# EAGLE board 2D_PCB (EAGLE 9.7.0)
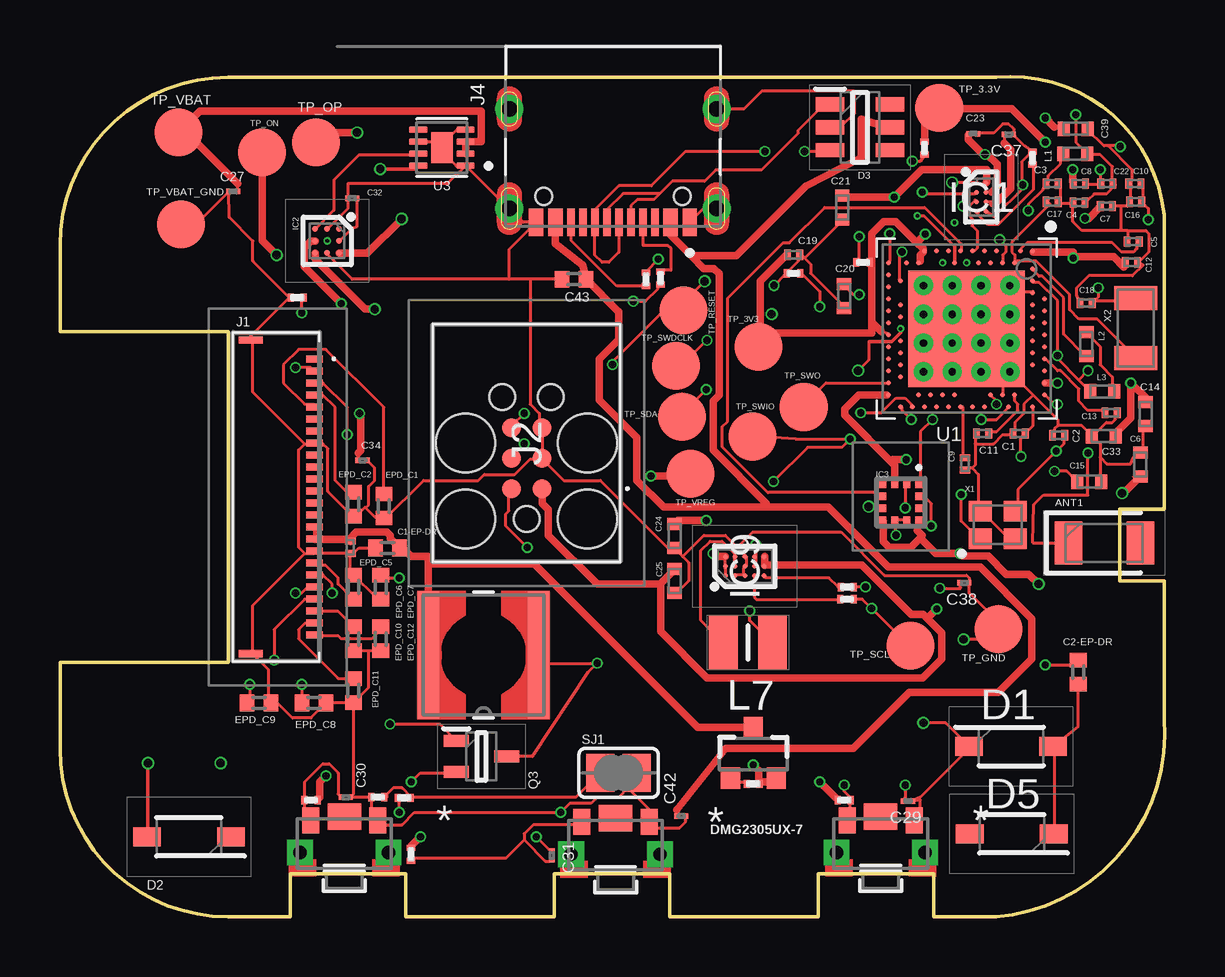
[diagram p0: board, top side]
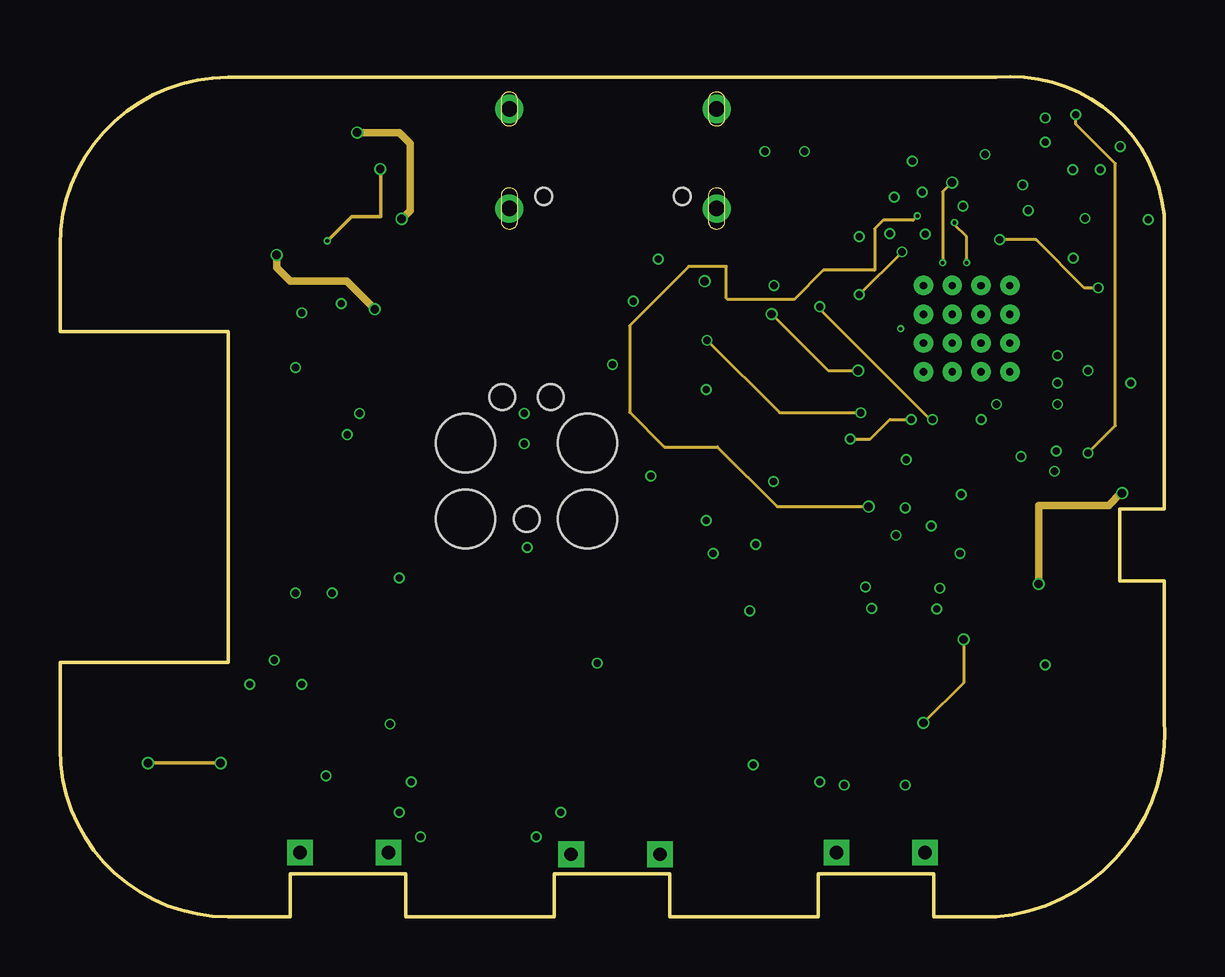
[diagram p1: board, inner layer Route2]
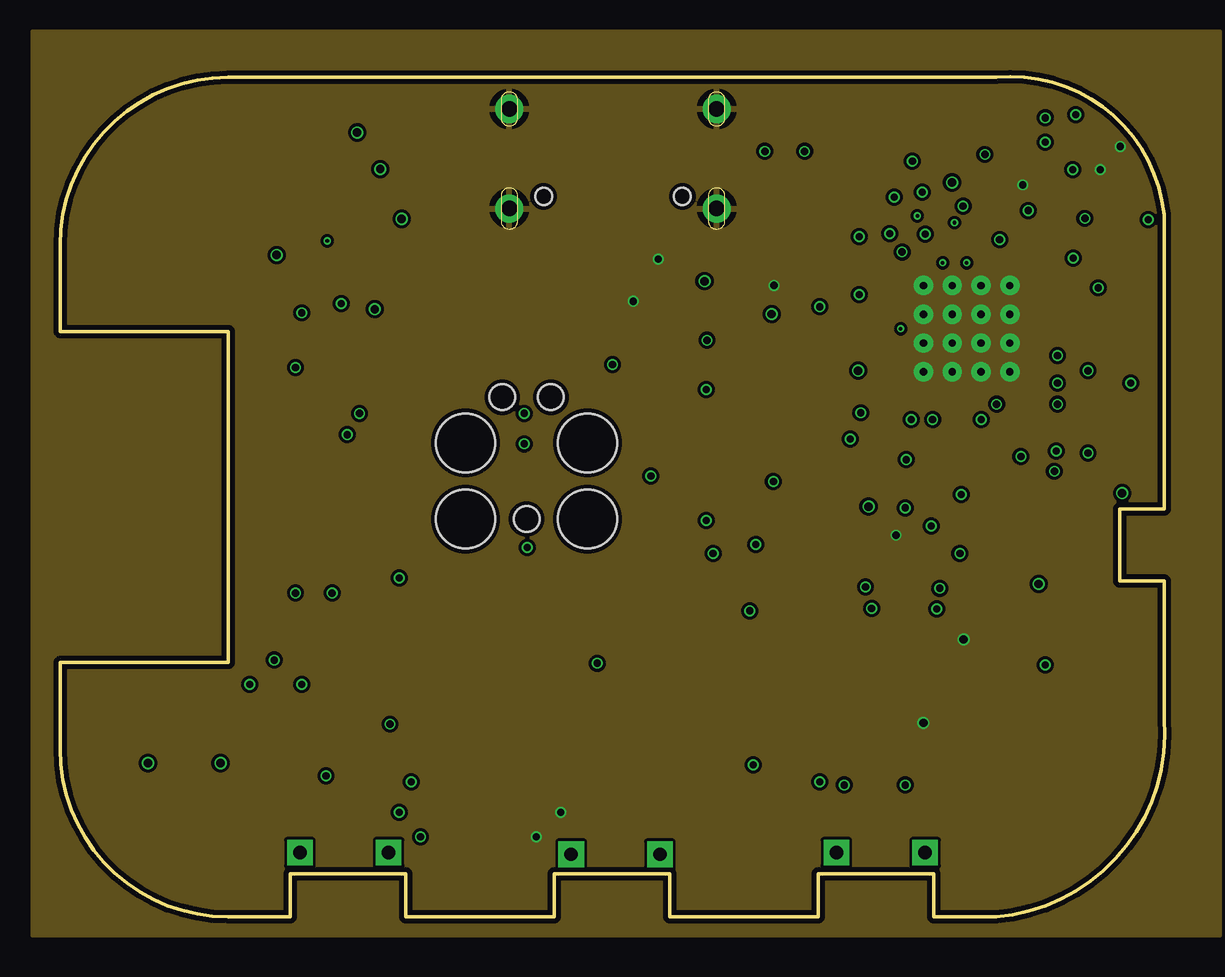
[diagram p2: board, inner layer Route15]
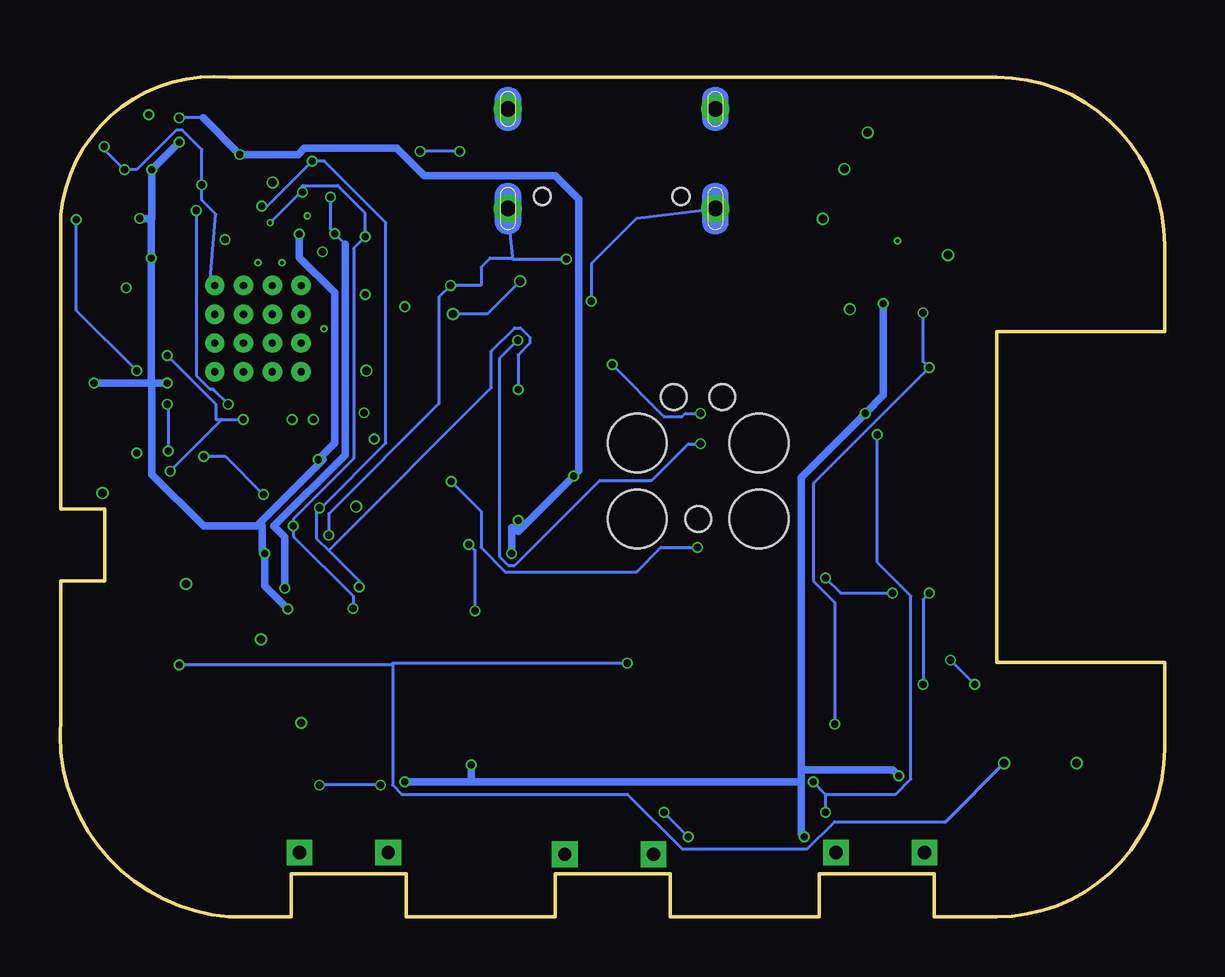
[diagram p3: board, bottom side, seen from below]

Size 46.03 x 35.03 mm. Coordinates in mm from the lower left corner, seen from the top.
Outline: 39,0 36.4,0 36.4,1.8 31.6,1.8 31.6,0 25.4,0 25.4,1.8 20.6,1.8 20.6,0 14.4,0 14.4,1.8 9.6,1.8 9.6,0 7,0 arc-90 0,7 0,10.6 7,10.6 7,24.4 0,24.4 0,28 arc-90 7,35 39,35 arc-90 46,29.27 46,17 44.16,17 44.16,14 46,14 46,8.27 arc-90 39,0
Copper layers (1+2*15+16): Top 0.035mm / dielectric 1.6mm / Route2 0.035mm / dielectric 0.15mm / Route15 0.035mm / dielectric 0.2mm / Bottom 0.035mm
Design rules "jlcpcb-2layers.dru *": minimum track width 5mil, minimum drill 0.3mm, track to track 5mil, track to pad 5mil, pad to pad 5mil, via to via 5mil, smd to smd 5mil, copper to edge 0.2mm, drill to drill 6mil, minimum pad ring 10mil, minimum via ring 3mil, stop-mask expansion 4mil, vias tented up to drill 0mil, thermal gap 10mil

## Footprints (pad centres in the part's own frame; a part is rotated, then mirrored left to right if it is on the bottom)
2450AT18B100E_ANTC3216X140N = smd 1.15 x 1.8: 1 -1.5,0; 2 1.5,0
NORDIC_NRF_3_RESC0201_L = smd 0.28 x 0.43: 1 -0.255,0; 2 0.255,0
PERFECT_0402_0402 = smd 0.6 x 0.7: 1 -0.5,0; 2 0.5,0
NORDIC_NRF_3_RESC0402_L = smd 0.5 x 0.6: 1 -0.5,0; 2 0.5,0
GRM011R60J152KE01L_2_CAPC0201X13N = smd 0.22 x 0.23: 1 -0.185,0; 2 0.185,0
ESP32_C6_LIBRARY_5_SOD3716X135N = smd 1.15 x 0.8: 1 -1.75,0; 2 1.75,0
ESP32_C6_LIBRARY_3_SOT95P280X145-6N = smd 1.2 x 0.6: 1 -1.25,0.95; 2 -1.25,0; 3 -1.25,-0.95; 4 1.25,-0.95; 5 1.25,0; 6 1.25,0.95
ESP32_C6_LIBRARY_4_ESP32_C6_LIBRARY_4_ESP32_C6_LIBRARY_4_ESP32_C6_LIBRARY_4_ESP32_WROVER_SPARKFUN-DISCRETESEMI_SOT23-3 = smd 0.8 x 0.9: 1 -0.95,-1; 2 0.95,-1; 3 0,1.1
BQ25180YBGR_BGA8C40P2X4_100X155X50 = smd 0.2 x 0.2: A1 -0.2,0.6; A2 0.2,0.6; B1 -0.2,0.2; B2 0.2,0.2; C1 -0.2,-0.2; C2 0.2,-0.2; D1 -0.2,-0.6; D2 0.2,-0.6
DRV2605YZFR_BGA9C50P3X3_144X144X62 = smd 0.25 x 0.25: A1 -0.5,0.5; A2 0,0.5; A3 0.5,0.5; B1 -0.5,0; B2 0,0; B3 0.5,0; C1 -0.5,-0.5; C2 0,-0.5; C3 0.5,-0.5
BMA423_BMA423 = smd 0.3 x 0.35: 1 -0.75,-0.775; 2 -0.25,-0.775; 3 0.25,-0.775; 4 0.75,-0.775; 7 0.75,0.775; 8 0.25,0.775; 9 -0.25,0.775; 10 -0.75,0.775 | smd 0.35 x 0.3: 5 0.775,-0.25; 6 0.775,0.25; 11 -0.775,0.25; 12 -0.775,-0.25
RT6160AWSC_BGA15C40P3X5_140X230X60 = smd 0.216 x 0.216: A1 -0.4,0.8; A2 0,0.8; A3 0.4,0.8; B1 -0.4,0.4; B2 0,0.4; B3 0.4,0.4; C1 -0.4,0; C2 0,0; C3 0.4,0; D1 -0.4,-0.4; D2 0,-0.4; D3 0.4,-0.4; E1 -0.4,-0.8; E2 0,-0.8; E3 0.4,-0.8
503480-2400_5034802400 = smd 0.3 x 0.7: 1 -5.75,1.525; 2 -5.25,1.525; 3 -4.75,1.525; 4 -4.25,1.525; 5 -3.75,1.525; 6 -3.25,1.525; 7 -2.75,1.525; 8 -2.25,1.525; 9 -1.75,1.525; 10 -1.25,1.525; 11 -0.75,1.525; 12 -0.25,1.525; 13 0.25,1.525; 14 0.75,1.525; 15 1.25,1.525; 16 1.75,1.525; 17 2.25,1.525; 18 2.75,1.525; 19 3.25,1.525; 20 3.75,1.525; 21 4.25,1.525; 22 4.75,1.525; 23 5.25,1.525; 24 5.75,1.525 | smd 0.3 x 1: MP1 -6.54,-1.125; MP2 6.54,-1.125
TC2030-IDC_TC2030IDC = smd 0.783 x 0.783: 1 -0.953,-0.635; 2 -0.953,0.635; 3 0.317,-0.635; 4 0.317,0.635; 5 1.588,-0.635; 6 1.588,0.635 | hole 2.451: -2.223,-2.54; -2.223,2.54; 0.952,-2.54; 0.952,2.54 | hole 1.067: -2.223,0; 2.857,-1.016; 2.857,1.016
KH-TYPE-C-16P_KINGHELM_KH-TYPE-C-16P = smd 0.6 x 1.15: A1_B12 -3.2,4.725; A4_B9 -2.4,4.725; A9_B4 2.4,4.725; A12_B1 3.2,4.725 | smd 0.3 x 1.15: A5 -1.25,4.725; A6 -0.25,4.725; A7 0.25,4.725; A8 1.25,4.725; B5 1.75,4.725; B6 0.75,4.725; B7 -0.75,4.725; B8 -1.75,4.725 | drill 0.65 pad 1.05: SH1 -4.32,0; SH2 4.32,0; SH3 -4.32,4.15; SH4 4.32,4.15 | hole 0.7: -2.89,3.65; 2.89,3.65
NORDIC_NRF_2_RESC0402_L = smd 0.5 x 0.6: 1 -0.5,0; 2 0.5,0
ESP32_C6_LIBRARY_2_IND_4828-WE-TPC_WRE = smd 0.9 x 5.3: 1 -2.286,0; 2 2.286,0
MLP2016SR47MT0S1_INDC2016X100N = smd 1.2 x 2.2: 1 -1.028,0; 2 1.028,0
ESP32_C6_LIBRARY_6_SOT65P210X110-3N = smd 1.05 x 0.5: 1 -1.05,0.65; 2 -1.05,-0.65; 3 1.05,0
CPF0201D7K68C1_0201 = smd 0.35 x 0.25: 1 0,0.275; 2 0,-0.275
ERA-1AEB3401C_0201 = smd 0.35 x 0.25: 1 0,0.275; 2 0,-0.275
ESP32_C6_LIBRARY_7_JUMPER_SJ = smd 1.168 x 1.6: 1 -0.762,0; 2 0.762,0
2025-10-22_07-23-44_LIBRARY_SW_EVP-AKE31A_PAN = smd 0.711 x 1.092: 1 -1.4,-0.972; 2 1.4,-0.972 | drill 0.559 pad 0.914 square: 3 -1.848,0.381; 4 1.848,0.381 | smd 1.397 x 1.092: 5 0,-1.124
HECTOR_WATCH_1_TP20R = smd 2 x 2: TP 0,0
NORDIC_NRF_4_AQFN50P700X700X85_HS-74N = smd 4.85 x 4.85: P$74 0,0 | drill 0.3 pad 0.6: P$75 -1.8,1.8; P$76 -0.6,1.8; P$77 0.6,1.8; P$78 1.8,1.8; P$79 -1.8,0.6; P$80 -0.6,0.6; P$81 0.6,0.6; P$82 1.8,0.6; P$83 -1.8,-0.6; P$84 -0.6,-0.6; P$85 0.6,-0.6; P$86 1.8,-0.6; P$87 -1.8,-1.8; P$88 -0.6,-1.8; P$89 0.6,-1.8; P$90 1.8,-1.8 | smd 0.2 x 0.2: P$A8 -1.25,3.25; P$A10 -0.75,3.25; P$A12 -0.25,3.25; P$A14 0.25,3.25; P$A16 0.75,3.25; P$A18 1.25,3.25; P$A20 1.75,3.25; P$A22 2.25,3.25; P$A23 2.75,3.25; P$AA24 3.25,-2.25; P$AB2 -2.75,-2.5; P$AC5 -2,-2.75; P$AC9 -1,-2.75; P$AC11 -0.5,-2.75; P$AC13 0,-2.75; P$AC15 0.5,-2.75; P$AC17 1,-2.75; P$AC19 1.5,-2.75; P$AC21 2,-2.75; P$AC24 3.25,-2.75; P$AD2 -2.75,-3.25; P$AD4 -2.25,-3.25; P$AD6 -1.75,-3.25; P$AD8 -1.25,-3.25; P$AD10 -0.75,-3.25; P$AD12 -0.25,-3.25; P$AD14 0.25,-3.25; P$AD16 0.75,-3.25; P$AD18 1.25,-3.25; P$AD20 1.75,-3.25; P$AD22 2.25,-3.25; P$AD23 2.75,-3.25; P$B1 -3.25,2.75; P$B3 -2.5,2.75; P$B5 -2,2.75; P$B7 -1.5,2.75; P$B9 -1,2.75; P$B11 -0.5,2.75; P$B13 0,2.75; P$B15 0.5,2.75; P$B17 1,2.75; P$B19 1.5,2.75; P$B24 3.25,2.75; P$C1 -3.25,2.25; P$D2 -2.75,2; P$D23 2.75,2; P$E24 3.25,1.75; P$F2 -2.75,1.5; P$F23 2.75,1.5; P$G1 -3.25,1.25; P$H2 -2.75,1; P$H23 2.75,1; P$J1 -3.25,0.75; P$J24 3.25,0.75; P$K2 -2.75,0.5; P$L1 -3.25,0.25; P$L24 3.25,0.25; P$M2 -2.75,0; P$N1 -3.25,-0.25; P$N24 3.25,-0.25; P$P2 -2.75,-0.5; P$P23 2.75,-0.5; P$R1 -3.25,-0.75; P$R24 3.25,-0.75; P$T2 -2.75,-1; P$T23 2.75,-1; P$U1 -3.25,-1.25; P$U24 3.25,-1.25; P$V23 2.75,-1.5; P$W1 -3.25,-1.75; P$W24 3.25,-1.75; P$Y2 -2.75,-2; P$Y23 2.75,-2
ESP32_C6_LIBRARY_SON50P200X200X80-9N = smd 0.76 x 0.27: 1 -0.985,0.75; 2 -0.985,0.25; 3 -0.985,-0.25; 4 -0.985,-0.75; 5 0.985,-0.75; 6 0.985,-0.25; 7 0.985,0.25; 8 0.985,0.75 | smd 0.9 x 1.3: 9 0,0
NORDIC_NRF_BT-XTAL_2016_N = smd 0.95 x 0.85: 1 -0.725,-0.575; 2 0.725,-0.575; 3 0.725,0.575; 4 -0.725,0.575
NORDIC_NRF_1_XTAL_3215_N = smd 1 x 1.8: 1 -1.25,0; 2 1.25,0

## Placement (x,y rotation side)
ANT1  2450AT18B100E  [2450AT18B100E_ANTC3216X140N]  43.51,15.59 0 top
C1  12pF  [NORDIC_NRF_3_RESC0201_L]  39.96,20.15 180 top
C1-EP-DR  10uF  [PERFECT_0402_0402]  13.65,15.38 180 top
C2  12pF  [NORDIC_NRF_3_RESC0201_L]  41.61,20.08 180 top
C2-EP-DR  4.7uF/25V  [PERFECT_0402_0402]  42.43,10.2 90 top
C3  1pF  [NORDIC_NRF_3_RESC0201_L]  41.33,30.57 0 top
C4  1pF  [NORDIC_NRF_3_RESC0201_L]  42.46,29.78 180 top
C5  100nF  [NORDIC_NRF_3_RESC0201_L]  44.71,28.15 180 top
C6  4.7μF  [NORDIC_NRF_3_RESC0402_L]  45.02,18.86 90 top
C7  100nF  [NORDIC_NRF_3_RESC0201_L]  43.59,29.63 0 top
C8  100nF  [NORDIC_NRF_3_RESC0201_L]  42.48,30.57 0 top
C9  820pF  [NORDIC_NRF_3_RESC0201_L]  37.71,18.88 270 top
C10  N.C.  [NORDIC_NRF_3_RESC0201_L]  44.79,30.57 180 top
C11  100pF  [NORDIC_NRF_3_RESC0201_L]  38.44,20.15 180 top
C12  100nF  [NORDIC_NRF_3_RESC0201_L]  44.64,27.29 0 top
C13  N.C.  [NORDIC_NRF_3_RESC0201_L]  43.8,21.02 0 top
C14  4.7μF  [NORDIC_NRF_3_RESC0402_L]  45.23,20.97 270 top
C15  1.0μF  [NORDIC_NRF_3_RESC0402_L]  42.88,18.15 0 top
C16  47nF  [NORDIC_NRF_3_RESC0201_L]  44.81,29.8 180 top
C17  12pF  [NORDIC_NRF_3_RESC0201_L]  41.33,29.8 180 top
C18  12pF  [NORDIC_NRF_3_RESC0201_L]  42.76,25.59 0 top
C19  100nF  [NORDIC_NRF_3_RESC0201_L]  30.56,27.59 0 top
C20  4.7μF  [NORDIC_NRF_3_RESC0402_L]  32.67,25.87 270 top
C21  4.7μF  [NORDIC_NRF_3_RESC0402_L]  32.59,29.56 270 top
C22  N.C.  [NORDIC_NRF_3_RESC0201_L]  43.62,30.57 180 top
C23  0.1uF  [GRM011R60J152KE01L_2_CAPC0201X13N]  38.06,32.65 0 top
C24  10uF  [NORDIC_NRF_3_RESC0402_L]  25.61,15.88 90 top
C25  22uF  [NORDIC_NRF_3_RESC0402_L]  25.61,14 270 top
C27  0.1uF  [GRM011R60J152KE01L_2_CAPC0201X13N]  7.22,30.24 0 top
C29  1uF  [GRM011R60J152KE01L_2_CAPC0201X13N]  35.33,4.84 180 top
C30  1uF  [GRM011R60J152KE01L_2_CAPC0201X13N]  11.91,4.99 180 top
C31  1uF  [GRM011R60J152KE01L_2_CAPC0201X13N]  20.49,2.57 270 top
C32  1uF  [GRM011R60J152KE01L_2_CAPC0201X13N]  12.18,29.96 0 top
C33  22uF  [NORDIC_NRF_3_RESC0402_L]  43.5,20.04 180 top
C34  0.1uF  [GRM011R60J152KE01L_2_CAPC0201X13N]  12.61,19.03 180 top
C37  1uF  [GRM011R60J152KE01L_2_CAPC0201X13N]  39.53,32.62 180 top
C38  10uF  [GRM011R60J152KE01L_2_CAPC0201X13N]  37.68,13.93 180 top
C39  1uF  [NORDIC_NRF_3_RESC0402_L]  42.33,32.85 0 top
C42  0.1uF  [GRM011R60J152KE01L_2_CAPC0201X13N]  25.89,4.2 0 top
C43  4.7uF  [PERFECT_0402_0402]  21.42,26.58 180 top
D1  MBR0530  [ESP32_C6_LIBRARY_5_SOD3716X135N]  39.63,7.1 0 top
D2  MBR0530  [ESP32_C6_LIBRARY_5_SOD3716X135N]  5.37,3.34 180 top
D3  USBLC6-2SC6Y  [ESP32_C6_LIBRARY_3_SOT95P280X145-6N]  33.33,32.91 0 top
D5  MBR0530  [ESP32_C6_LIBRARY_5_SOD3716X135N]  39.66,3.46 180 top
DMG2305UX-7  20V/4.2A/52mΩ/1.4W  [ESP32_C6_LIBRARY_4_ESP32_C6_LIBRARY_4_ESP32_C6_LIBRARY_4_ESP32_C6_LIBRARY_4_ESP32_WROVER_SPARKFUN-DISCRETESEMI_SOT23-3]  28.89,6.79 0 top
EPD_C1  1uF/50V  [PERFECT_0402_0402]  13.5,17.13 270 top
EPD_C2  1uF/50V  [PERFECT_0402_0402]  12.23,17.21 270 top
EPD_C5  0.1uF/50V  [NORDIC_NRF_3_RESC0201_L]  12.1,15.4 90 top
EPD_C6  1uF/50V  [PERFECT_0402_0402]  12.23,13.75 90 top
EPD_C7  1uF/50V  [PERFECT_0402_0402]  13.37,13.75 270 top
EPD_C8  1uF/50V  [PERFECT_0402_0402]  10.57,8.92 0 top
EPD_C9  1uF/50V  [PERFECT_0402_0402]  8.29,8.92 0 top
EPD_C10  1uF/50V  [PERFECT_0402_0402]  12.23,11.59 270 top
EPD_C11  1uF/50V  [PERFECT_0402_0402]  12.23,9.43 270 top
EPD_C12  1uF/50V  [PERFECT_0402_0402]  13.37,11.59 270 top
IC1  BQ25180YBGR  [BQ25180YBGR_BGA8C40P2X4_100X155X50]  38.39,30.01 0 top
IC2  DRV2605YZFR  [DRV2605YZFR_BGA9C50P3X3_144X144X62]  11.13,28.18 270 top
IC3  BMA421  [BMA423_BMA423]  35.04,17.28 180 top
IC9  RT6160AWSC  [RT6160AWSC_BGA15C40P3X5_140X230X60]  28.53,14.61 90 top
J1  503480-2400_503480-2400  [503480-2400_5034802400]  9.08,17.51 270 top
J2  TC2030-IDC  [TC2030-IDC_TC2030IDC]  19.44,18.81 90 top
J4  KH-TYPE-C-16P  [KH-TYPE-C-16P_KINGHELM_KH-TYPE-C-16P]  23.04,33.68 180 top
L1  3.9nH  [NORDIC_NRF_2_RESC0402_L]  42.3,31.81 0 top
L2  10μH  [NORDIC_NRF_2_RESC0402_L]  42.77,23.88 90 top
L3  15nH  [NORDIC_NRF_2_RESC0402_L]  43.42,21.9 180 top
L5  68uH  [ESP32_C6_LIBRARY_2_IND_4828-WE-TPC_WRE]  17.65,10.91 180 top
L7  FTC252012SR47MBCA  [MLP2016SR47MT0S1_INDC2016X100N]  28.66,11.44 0 top
Q3  SI1308EDL-T1-GE3  [ESP32_C6_LIBRARY_6_SOT65P210X110-3N]  17.56,6.69 0 top
R1_EP_DR  0.47  [CPF0201D7K68C1_0201]  14.35,4.96 270 top
R1_USB  5K1  [CPF0201D7K68C1_0201]  25.02,26.63 180 top
R2  0  [CPF0201D7K68C1_0201]  32.8,13.75 270 top
R2_EP_DR  10K  [CPF0201D7K68C1_0201]  9.89,25.82 90 top
R2_USB  5K1  [CPF0201D7K68C1_0201]  24.42,26.58 180 top
R3  0  [CPF0201D7K68C1_0201]  30.56,26.83 90 top
R4  0  [CPF0201D7K68C1_0201]  32.79,13.24 270 top
R5  10K  [CPF0201D7K68C1_0201]  10.46,4.87 90 top
R7  10K  [CPF0201D7K68C1_0201]  32.67,4.87 270 top
R8  10K  [CPF0201D7K68C1_0201]  14.63,2.61 180 top
R9  10K  [CPF0201D7K68C1_0201]  40.52,31.63 0 top
R17  3K3  [ERA-1AEB3401C_0201]  33.46,27.28 270 top
R18  3k3  [ERA-1AEB3401C_0201]  36.03,32.05 0 top
R_PWR_EPD  10K  [CPF0201D7K68C1_0201]  28.89,5.55 90 top
R_TYPE_SEL  2.2  [CPF0201D7K68C1_0201]  13.24,4.99 90 top
SJ1  [ESP32_C6_LIBRARY_7_JUMPER_SJ]  23.27,6 180 top
SW_DN  2025-10-22_07-23-44_LIBRARY_EVP-AKE31ASW_EVP-AKE31A_PAN  [2025-10-22_07-23-44_LIBRARY_SW_EVP-AKE31A_PAN]  34.2,3.05 180 top
SW_ENT  2025-10-22_07-23-44_LIBRARY_EVP-AKE31ASW_EVP-AKE31A_PAN  [2025-10-22_07-23-44_LIBRARY_SW_EVP-AKE31A_PAN]  23.15,2.99 180 top
SW_UP  2025-10-22_07-23-44_LIBRARY_EVP-AKE31ASW_EVP-AKE31A_PAN  [2025-10-22_07-23-44_LIBRARY_SW_EVP-AKE31A_PAN]  11.85,3.05 180 top
TP_3.3V  HECTOR_WATCH_1_TPTP20R  [HECTOR_WATCH_1_TP20R]  36.64,33.72 180 top
TP_3V3  HECTOR_WATCH_1_TPTP20R  [HECTOR_WATCH_1_TP20R]  29.11,23.77 180 top
TP_GND  HECTOR_WATCH_1_TPTP20R  [HECTOR_WATCH_1_TP20R]  39.1,11.99 180 top
TP_ON  HECTOR_WATCH_1_TPTP20R  [HECTOR_WATCH_1_TP20R]  8.42,31.86 0 top
TP_OP  HECTOR_WATCH_1_TPTP20R  [HECTOR_WATCH_1_TP20R]  10.66,32.29 270 top
TP_RESET  HECTOR_WATCH_1_TPTP20R  [HECTOR_WATCH_1_TP20R]  25.99,25.29 180 top
TP_SCL  HECTOR_WATCH_1_TPTP20R  [HECTOR_WATCH_1_TP20R]  35.44,11.31 180 top
TP_SDA  HECTOR_WATCH_1_TPTP20R  [HECTOR_WATCH_1_TP20R]  25.92,20.85 180 top
TP_SWDCLK  HECTOR_WATCH_1_TPTP20R  [HECTOR_WATCH_1_TP20R]  25.66,22.98 180 top
TP_SWIO  HECTOR_WATCH_1_TPTP20R  [HECTOR_WATCH_1_TP20R]  28.86,20.03 270 top
TP_SWO  HECTOR_WATCH_1_TPTP20R  [HECTOR_WATCH_1_TP20R]  30.99,21.25 180 top
TP_VBAT  HECTOR_WATCH_1_TPTP20R  [HECTOR_WATCH_1_TP20R]  4.94,32.7 0 top
TP_VBAT_GND  HECTOR_WATCH_1_TPTP20R  [HECTOR_WATCH_1_TP20R]  5.04,28.86 0 top
TP_VREG  HECTOR_WATCH_1_TPTP20R  [HECTOR_WATCH_1_TP20R]  26.27,18.48 180 top
U1  NRF52840_QF  [NORDIC_NRF_4_AQFN50P700X700X85_HS-74N]  37.78,24.52 270 top
U3  MAX17048G+T10  [ESP32_C6_LIBRARY_SON50P200X200X80-9N]  15.91,32.06 180 top
X1  32MHz  [NORDIC_NRF_BT-XTAL_2016_N]  39.07,16.34 0 top
X2  32.768kHz  [NORDIC_NRF_1_XTAL_3215_N]  44.82,24.55 90 top

## Library data of the parts
ANT1 = InkTime_v5; ARROW_PART_NUMBER: 2450AT18B100E; ARROW_PRICE-STOCK: https://www.arrow.com/en/products/2450at18b100e/johanson-dielectrics?utm_currency=USD&region=nac; DESCRIPTION: Antennas 2.45GHz ANTENNA; HEIGHT: 1.4mm; MANUFACTURER_NAME: JOHANSON TECHNOLOGY; MANUFACTURER_PART_NUMBER: 2450AT18B100E; MOUSER_PART_NUMBER: 609-2450AT18B100E; MOUSER_PRICE-STOCK: https://www.mouser.co.uk/ProductDetail/Johanson-Technology/2450AT18B100E?qs=yCnrNFeXz%252Bh5MFsFIXGZGA%3D%3D
C1-C22 C24 C25 C33 C39 L1-L3 R2-R4 R9 R17 R18 TP_3.3V TP_3V3 TP_GND TP_RESET TP_SCL TP_SDA TP_SWDCLK TP_SWIO TP_SWO TP_VREG U1 X1 X2 = InkTime_v5
C1-EP-DR C2-EP-DR C43 EPD_C1 EPD_C2 EPD_C5-EPD_C12 R1_EP_DR R1_USB R2_EP_DR R2_USB R5 R7 R8 R_PWR_EPD R_TYPE_SEL SJ1 TP_ON TP_OP TP_VBAT TP_VBAT_GND = Library_proiect
C23 C27 C29-C32 C34 C37 C38 C42 = InkTime_v5; AVAILABILITY: In Stock; CHECK_PRICES: https://www.snapeda.com/parts/GRM011R60J152KE01L/Murata/view-part/?ref=eda; DESCRIPTION: SMD Capacitor X5R(EIA) with Capacitance: 1500pF Tol. 10%. Rated Voltage: 6.3Vdc; MF: Murata; MP: GRM011R60J152KE01L; PACKAGE: 0201 Murata; PRICE: None; SNAPEDA_LINK: https://www.snapeda.com/parts/GRM011R60J152KE01L/Murata/view-part/?ref=snap
D1 D2 D5 = Library_proiect; AVAILABILITY: In Stock; CHECK_PRICES: https://www.snapeda.com/parts/MBR0530/Onsemi/view-part/?ref=eda; DESCRIPTION: Diode Schottky 30 V 500mA Surface Mount SOD-123; MF: ON Semiconductor; MP: MBR0530; PACKAGE: SOD-123-2 ON Semiconductor; PRICE: None; PURCHASE-URL: https://www.snapeda.com/api/url_track_click_mouser/?unipart_id=179458&manufacturer=ON Semiconductor&part_name=MBR0530&search_term=None; SNAPEDA_LINK: https://www.snapeda.com/parts/MBR0530/Onsemi/view-part/?ref=snap
D3 = Library_proiect; AVAILABILITY: In Stock; CHECK_PRICES: https://www.snapeda.com/parts/USBLC6-2SC6Y/STMicroelectronics/view-part/?ref=eda; DESCRIPTION: 17V Clamp 5A (8/20µs) Ipp Tvs Diode Surface Mount SOT-23-6; MF: STMicroelectronics; MP: USBLC6-2SC6Y; PACKAGE: SOT-23-6 STMicroelectronics; PRICE: None; SNAPEDA_LINK: https://www.snapeda.com/parts/USBLC6-2SC6Y/STMicroelectronics/view-part/?ref=snap
DMG2305UX-7 = Library_proiect; PROD_ID: TRAN-14388
IC1 = InkTime_v5; ARROW_PART_NUMBER: BQ25180YBGR; ARROW_PRICE-STOCK: https://www.arrow.com/en/products/bq25180ybgr/texas-instruments?utm_currency=USD&region=nac; DESCRIPTION: Charger IC Lithium Ion/Polymer, Lithium Iron Phosphate 8-DSBGA (1.6x1.1); HEIGHT: 0.5mm; MANUFACTURER_NAME: Texas Instruments; MANUFACTURER_PART_NUMBER: BQ25180YBGR; MOUSER_PART_NUMBER: 595-BQ25180YBGR; MOUSER_PRICE-STOCK: https://www.mouser.co.uk/ProductDetail/Texas-Instruments/BQ25180YBGR?qs=doiCPypUmgEWjAK%252BJAX6Tw%3D%3D
IC2 = Library_proiect; ARROW_PART_NUMBER: DRV2605YZFR; ARROW_PRICE-STOCK: https://www.arrow.com/en/products/drv2605yzfr/texas-instruments?region=nac; DESCRIPTION: Haptic Driver for ERM/LRA with Built-In Library and Smart Loop Architecture; HEIGHT: 0.625mm; MANUFACTURER_NAME: Texas Instruments; MANUFACTURER_PART_NUMBER: DRV2605YZFR
IC3 = InkTime_v5; ARROW_PART_NUMBER: BMA423; ARROW_PRICE-STOCK: https://www.arrow.com/en/products/bma423/bosch; DESCRIPTION: Accelerometers Triaxial low-g 12bit Acceleration Sensor; HEIGHT: 1mm; MANUFACTURER_NAME: BOSCH; MANUFACTURER_PART_NUMBER: BMA423; MOUSER_PART_NUMBER: 262-BMA423; MOUSER_PRICE-STOCK: https://www.mouser.co.uk/ProductDetail/Bosch-Sensortec/BMA423?qs=HXFqYaX1Q2xC%252BSgeGoX3mg%3D%3D
IC9 = InkTime_v5; DESCRIPTION: Buck-Boost Regulator Positive Output Step-Up/Step-Down I2C DC-DC Controller IC 15-WL-CSP (BSC) (1.4x2.3); HEIGHT: 0.6mm; MANUFACTURER_NAME: RICHTEK; MANUFACTURER_PART_NUMBER: RT6160AWSC; MOUSER_PART_NUMBER: 835-RT6160AWSC; MOUSER_PRICE-STOCK: https://www.mouser.co.uk/ProductDetail/Richtek/RT6160AWSC?qs=amGC7iS6iy%2FLd9PSoixZXQ%3D%3D
J1 = Library_proiect; DESCRIPTION: FFC & FPC Connectors 0.5mm FPC RA SMT Dual Contact 24Ckt; HEIGHT: 1.87mm; MANUFACTURER_NAME: Molex; MANUFACTURER_PART_NUMBER: 503480-2400; MOUSER_PART_NUMBER: 538-503480-2400; MOUSER_PRICE-STOCK: https://www.mouser.co.uk/ProductDetail/Molex/503480-2400?qs=OAhjpuo3Vu7efIoxFh9AOw%3D%3D
J2 = InkTime_v5; DESCRIPTION: CABLE ADAPTER 6 POS; HEIGHT: 19mm; MANUFACTURER_NAME: Tag Connect; MANUFACTURER_PART_NUMBER: TC2030-IDC
J4 = Library_proiect; AVAILABILITY: Not in stock; CHECK_PRICES: https://www.snapeda.com/parts/KH-TYPE-C-16P/Kinghelm/view-part/?ref=eda; MF: kinghelm; MP: KH-TYPE-C-16P; PACKAGE: None; PRICE: None; SNAPEDA_LINK: https://www.snapeda.com/parts/KH-TYPE-C-16P/Kinghelm/view-part/?ref=snap
L5 = Library_proiect; COPYRIGHT: Copyright (C) 2024 Ultra Librarian. All rights reserved.; MANUFACTURER_PART_NUMBER: 744043680; MFR_NAME: Wurth Electronics
L7 = InkTime_v5; DESCRIPTION: SMD / SMT Inductors (Coils), L=0.47?H, L x W x T :; HEIGHT: 1mm; JLCPCB: https://jlcpcb.com/partdetail/6763488-FTC252012SR47MBCA/C5832368; MANUFACTURER_NAME: TDK; MANUFACTURER_PART_NUMBER: FTC252012SR47MBCA
Q3 = Library_proiect; AVAILABILITY: In Stock; CHECK_PRICES: https://www.snapeda.com/parts/SI1308EDL-T1-GE3/Vishay+Siliconix/view-part/?ref=eda; DESCRIPTION: Si1308EDL-T1-GE3 N-channel MOSFET Transistor, 1.5 A, 30 V, 3-Pin SC-70 | Siliconix / Vishay SI1308EDL-T1-GE3; MF: Vishay Siliconix; MP: SI1308EDL-T1-GE3; PACKAGE: SOT-323 Vishay Semiconductor; PRICE: None; PURCHASE-URL: https://www.snapeda.com/api/url_track_click_mouser/?unipart_id=274603&manufacturer=Vishay Siliconix&part_name=SI1308EDL-T1-GE3&search_term=None; SNAPEDA_LINK: https://www.snapeda.com/parts/SI1308EDL-T1-GE3/Vishay+Siliconix/view-part/?ref=snap
SW_DN SW_ENT SW_UP = Library_proiect; COPYRIGHT: Copyright (C) 2025 Ultra Librarian. All rights reserved.; DIGI-KEY_PART_NUMBER_1: P123437TR-ND; DIGI-KEY_PART_NUMBER_2: P123437CT-ND; DIGI-KEY_PART_NUMBER_3: P123437DKR-ND; MANUFACTURER_NAME: Panasonic; MANUFACTURER_PART_NUMBER: EVP-AKE31A
U3 = Library_proiect; AVAILABILITY: In Stock; CHECK_PRICES: https://www.snapeda.com/parts/MAX17048G+T10/Analog+Devices/view-part/?ref=eda; DESCRIPTION: 3µA 1-Cell/2-Cell Fuel Gauge with ModelGauge; MF: Analog Devices; MP: MAX17048G+T10; PACKAGE: TDFN-8 Maxim; PRICE: None; PURCHASE-URL: https://www.snapeda.com/api/url_track_click_mouser/?unipart_id=329239&manufacturer=Analog Devices&part_name=MAX17048G+T10&search_term=None; SNAPEDA_LINK: https://www.snapeda.com/parts/MAX17048G+T10/Analog+Devices/view-part/?ref=snap

## Nets
3V3/1.7D: C34.2 DMG2305UX-7.2 IC2.C2 R5.2 R7.2 R8.2 R_PWR_EPD.2
3V3/2.4A: C6.1 C7.1 C8.1 C12.1 C14.1 C19.1 C25.1 C33.1 IC3.3 IC3.7 IC3.10 IC9.E2 IC9.E3 J2.1 R17.1 R18.1 TP_3.3V.TP TP_3V3.TP U1.P$A22 U1.P$AD14 U1.P$AD23 U1.P$B1 U1.P$W1 U1.P$Y2
ALERT/1.6C: U3.5
ALERT/2.5C: U1.P$J24
D+/1.5D: D3.4
D+/2.7D: U1.P$AD6
D-/1.5D: D3.6
D-/2.7D: U1.P$AD4
DEC1: C5.1 U1.P$C1
DEC3: C11.1 U1.P$D23
DEC4_6: C10.1 C15.1 C16.1 L3.2 U1.P$B5 U1.P$E24
DN: D3.1 J4.A7 J4.B7
DP: D3.3 J4.A6 J4.B6
EPD_3V3: C1-EP-DR.1 DMG2305UX-7.3 EPD_C5.2 J1.15 J1.16 L5.2
EPD_BUSY/1.5D: J1.9
EPD_BUSY/2.2D: U1.P$AD12
EPD_CS/1.4C: J1.12
EPD_CS/2.2D: U1.P$K2
EPD_DC/1.5D: J1.11
EPD_DC/2.2D: U1.P$AD10
EPD_RST/1.5D: J1.10
EPD_RST/2.2D: U1.P$AC11
GDR: J1.2 Q3.1 R2_EP_DR.2
GND: C1-EP-DR.2 C1.2 C2.2 C3.2 C4.2 C5.2 C6.2 C7.2 C8.2 C9.2 C10.2 C11.2 C12.2 C13.2 C14.2 C15.2 C16.2 C17.1 C18.1 C19.2 C20.2 C21.2 C22.2 C23.2 C24.1 C25.2 C27.1 C29.1 C30.1 C31.1 C32.1 C33.2 C34.1 C37.1 C38.1 C39.2 C42.2 C43.2 D1.1 D3.2 EPD_C1.2 EPD_C2.2 EPD_C5.1 EPD_C6.2 EPD_C7.2 EPD_C8.2 EPD_C9.2 EPD_C10.2 EPD_C11.2 EPD_C12.2 IC1.D2 IC2.B1 IC2.B3 IC3.8 IC3.9 IC9.B1 IC9.C1 IC9.C2 IC9.C3 J1.8 J1.17 J1.MP1 J1.MP2 J2.3 J2.5 J4.A1_B12 J4.A12_B1 J4.SH1 J4.SH2 J4.SH3 J4.SH4 R1_USB.1 R2_EP_DR.1 R2_USB.2 R3.1 R9.1 R_TYPE_SEL.1 SJ1.1 SW_DN.1 SW_ENT.1 SW_UP.1 TP_GND.TP TP_VBAT_GND.TP U1.P$74 U1.P$75 U1.P$76 U1.P$77 U1.P$78 U1.P$79 U1.P$80 U1.P$81 U1.P$82 U1.P$83 U1.P$84 U1.P$85 U1.P$86 U1.P$87 U1.P$88 U1.P$89 U1.P$90 U1.P$B7 U1.P$F23 U3.1 U3.4 U3.6 U3.9 X1.2 X1.4
HAPTIC-EN/1.4C: IC2.A1
HAPTIC_EN/2.6A: U1.P$U1
IMU_INT1: IC3.5 U1.P$N1
IMU_INT2: IC3.6 U1.P$P2
LX1: IC9.B2 IC9.B3 L7.1
LX2: IC9.D2 IC9.D3 L7.2
MOSI/1.5B: J1.14
MOSI/2.2D: U1.P$B13
N$1: C3.1 L1.1 U1.P$H23
N$2: IC9.D1 R4.2
N$3: C17.2 U1.P$D2 X2.1
N$4: IC9.E1 R2.2
N$5: C18.2 U1.P$F2 X2.2
N$6: L2.1 U1.P$B3
N$7: IC1.D1 R9.2
N$8: L2.2 L3.1
N$9: C2-EP-DR.1 D1.2 D5.1
N$10: C1.1 U1.P$B24 X1.1
N$11: IC3.1 R3.2
N$12: C2-EP-DR.2 D2.2 L5.1 Q3.3
N$13: C9.1 U1.P$N24
N$14: C2.1 U1.P$A23 X1.3
N$15: R1_EP_DR.1 R_TYPE_SEL.2 SJ1.2
N$16: C32.2 IC2.A2
N$17: C20.1 U1.P$AC5
N$18: J4.B5 R2_USB.1
N$19: J4.A5 R1_USB.2
N$20: EPD_C2.1 J1.4
N$21: EPD_C1.1 J1.5
N$22: EPD_C6.1 J1.18
N$23: EPD_C7.1 J1.19
N$24: C13.1 U1.P$A18
N$25: EPD_C8.1 J1.20
N$26: EPD_C9.1 J1.21
N$27: EPD_C10.1 J1.22
N$28: EPD_C11.1 J1.23
N$29: EPD_C12.1 J1.24
OUT+: IC2.A3 TP_OP.TP
OUT-: IC2.C3 TP_ON.TP
P0.04: U1.P$J1
P0.09: U1.P$L24
P0.13/1.5D: C30.2 R5.1 SW_UP.2
P0.13/2.6C: U1.P$AD8
P0.14/1.5D: C31.2 R8.1 SW_ENT.2
P0.14/2.7C: U1.P$AC9
P0.19: U1.P$AC15
P0.20: U1.P$AD16
P0.21: U1.P$AC17
P0.22: U1.P$AD18
P0.23: U1.P$AC19
P0.24: U1.P$AD20
P0.25: U1.P$AC21
P0.26: U1.P$G1
P0.27: U1.P$H2
P0.28: U1.P$B11
P0.29: U1.P$A10
P0.30: U1.P$B9
P0.31: U1.P$A8
P1.01/1.6C: DMG2305UX-7.1 R_PWR_EPD.1
P1.01/2.4B: U1.P$Y23
P1.02/1.6C: C29.2 R7.1 SW_DN.2
P1.02/2.8C: U1.P$W24
P1.03: U1.P$V23
P1.04: U1.P$U24
P1.05: U1.P$T23
P1.06: U1.P$R24
P1.07: U1.P$P23
P1.09: U1.P$R1
P1.10: U1.P$A20
P1.11: U1.P$B19
P1.12: U1.P$B17
P1.13: U1.P$A16
P1.14: U1.P$B15
P1.15: U1.P$A14
PMIC_INT: IC1.A1 U1.P$T2
PREVGH: D2.1
PREVGL: D5.2
RESE: J1.3 Q3.2 R1_EP_DR.2
RESET: J2.6 TP_RESET.TP U1.P$AC13
RF: ANT1.1 C4.1 C22.1 L1.2
SCK/1.5B: J1.13
SCK/2.2D: U1.P$A12
SCL/1.4C: IC2.C1 U3.7
SCL/2.4C: IC1.B1 IC3.12 R4.1 R17.2 TP_SCL.TP U1.P$M2
SDA/1.4C: IC2.B2 U3.8
SDA/2.4C: IC1.C1 IC3.2 R2.1 R18.2 TP_SDA.TP U1.P$L1
SWDCLK: J2.4 TP_SWDCLK.TP U1.P$AA24
SWDIO: J2.2 TP_SWIO.TP U1.P$AC24
SWO: TP_SWO.TP U1.P$AD22
VBAT/1.2A: C27.2 TP_VBAT.TP U3.2 U3.3
VBAT/2.5C: C37.2 IC1.C2
VBUS/1.5D: C42.1 C43.1 D3.5 J4.A4_B9 J4.A9_B4
VBUS/2.6D: C21.1 C38.2 IC1.A2 U1.P$AD2
VREG: C23.1 C24.2 C39.1 IC1.B2 IC9.A1 IC9.A2 IC9.A3 TP_VREG.TP

## Tracks (layer width: path | path; a pad name or v marks a point on that pad's centre or on a via)
3V3/1.7D  (via drill 0.3)
  Top 0.127: 29.24,5.62 R_PWR_EPD.2 29.12,5.62 | 29.62,5.62 DMG2305UX-7.2 | 14.64,2.96 R8.2 | 10.83,4.99 R5.2 | 32.29,4.99 R7.2 | v28.89,6.33 29.12,6.11
  Top 0.15: 12.42,19.34 C34.2
  Top 0.305: 29.62,5.62 29.24,5.62 | v11.72,25.56 10.17,27.11 10.17,27.89 10.46,28.18 IC2.C2 | v12.48,20.99 12.53,20.94 12.53,19.45 12.42,19.34 | v15.02,3.34 14.64,2.96 | 10.83,4.99 10.83,5.62 v11.08,5.88 | v31.66,5.62 32.29,4.99 | 29.12,6.11 29.12,5.62
  Bottom 0.305: v11.72,25.56 11.72,21.75 v12.48,20.99 15.15,18.32 15.15,6.13 | 15.15,5.62 15.15,3.46 v15.02,3.34 | 15.15,6.13 15.15,5.62 | 15.15,6.13 11.34,6.13 v11.08,5.88 | 15.15,5.62 28.89,5.62 | 28.89,5.62 v31.66,5.62 | 28.89,5.62 v28.89,6.33
3V3/2.4A  (via drill 0.3, 0.35)
  Top 0.127: 29.37,15.02 IC9.E3 | 29.37,14.64 IC9.E2 | 25.59,14.47 C25.1 | 20.1,17.82 J2.1 | 35.94,15.9 35.84,15.8 | 35.72,16.11 35.72,16.42 IC3.10 | 34.3,16.48 IC3.7 | C6.1 44.72,18.36 | v37.5,15.15 37.6,15.05 | 35.85,27.34 U1.P$Y2 | 35.98,27.72 U1.P$W1 35.98,27.85 | U1.P$AD14 34.48,24.32 34.23,24.39 | 33.82,27.21 R17.1 33.82,27.34 | 30.26,27.59 C19.1 | TP_3V3.TP 29.12,24.29 29.17,24.29 | 36.61,33.69 TP_3.3V.TP 36.74,33.69 | 34.7,18.91 34.7,19.06 | 34.45,21.75 U1.P$AD23 | IC3.3 | 40.55,27.72 U1.P$B1 | C14.1 45.23,21.64 | 41.05,22.26 U1.P$A22 | 42.2,30.64 C8.1 | 44.1,20.28 44.1,20.1 | 44.32,17.66 v44.25,17.66
  Top 0.305: 29.37,15.02 29.37,14.66 | 29.37,14.66 29.37,14.64 | 29.37,14.66 33.41,14.66 35.47,12.61 35.98,12.61 36.14,12.44 | 36.14,12.44 36.74,11.85 36.74,10.75 35.95,9.97 26.96,9.97 25.03,11.9 25.03,13.88 25,13.88 | 25.59,14.47 25,13.88 | 20.1,17.82 20.1,17.23 20.35,16.98 20.35,15.91 22.39,13.88 25,13.88 | 34.3,16.48 34.3,15.66 34.55,15.4 35.44,15.4 35.84,15.8 36.48,15.15 v37.5,15.15 | v40.78,13.88 40.37,14.28 39.43,14.28 38.67,15.05 37.6,15.05 | 35.72,16.11 35.94,15.9 | 35.85,27.34 35.85,27.59 35.98,27.72 | 33.82,24.8 34.23,24.39 | 33.82,27.21 33.82,24.8 | 33.82,24.8 33.82,24.34 29.17,24.34 | 35.71,28.12 34.83,28.99 34.32,28.99 33.82,28.48 33.82,27.34 | 35.71,28.12 35.98,27.85 | 30.26,27.59 29.17,26.5 29.17,24.34 | 29.17,24.29 29.17,24.34 | R18.1 36.03,33.11 36.61,33.69 | 34.45,21.75 33.28,21.75 32.7,21.17 32.7,20.91 34.7,18.91 34.78,18.83 IC3.3 | 42.22,27.52 43.9,27.52 44.32,27.1 C12.1 | 40.55,27.72 42.22,27.72 42.22,27.52 | v41.56,22.26 41.05,22.26 | 45.23,21.64 v44.61,22.26 44.61,20.79 44.1,20.28 | v42.2,31.15 42.2,30.64 | v42.71,29.12 42.86,29.12 43.34,29.6 C7.1 | 44.1,20.1 C33.1 | v42.22,27.47 42.22,27.52 | v35.26,19.06 34.7,19.06 | 36.74,33.69 39.66,33.69 v41.05,32.29 | v36.05,28.46 35.71,28.12 | v36.53,12.84 36.14,12.44 | C6.1 44.32,17.66
  Route2 0.305: v44.25,17.66 44.2,17.66 43.7,17.16 40.78,17.16 v40.78,13.88
  Bottom 0.127: 42.2,29.12 42.22,29.12 | v35.26,19.06 35.06,19.06 | 37.83,16.29 37.6,16.29
  Bottom 0.305: v44.61,22.26 42.22,22.26 | 42.22,22.26 42.2,22.26 | 42.2,22.26 v41.56,22.26 | 42.22,22.26 v42.22,27.47 42.22,29.12 v42.71,29.12 | 42.2,29.12 v42.2,31.15 v41.05,32.29 | 35.06,19.06 37.83,16.29 40.04,16.29 42.2,18.45 42.2,22.26 | v36.05,28.46 36.05,27.49 34.58,26.02 34.58,19.75 v35.26,19.06 | 37.6,16.29 37.6,15.25 v37.5,15.15 37.5,13.8 v36.53,12.84
DEC1
  Top 0.127: U1.P$C1 40.04,27.85 40.29,28.1 43.85,28.1 44.23,27.72 44.74,27.72 44.86,27.85 44.86,28.1 C5.1
DEC3
  Top 0.127: U1.P$D23 39.78,21.75 39.78,21.5 39.91,21.37 39.91,21.12 39.02,20.23 38.77,20.23 C11.1
DEC4_6  (via drill 0.3)
  Top 0.127: v38.39,20.74 39.02,20.74 39.53,21.24 U1.P$E24 | v41.44,18.58 41.94,18.58 42.33,18.2 C15.1 | C10.1 45.12,30.41 45.12,29.88 C16.1 45.35,29.52 v45.35,29.07 | 42.45,22.39 42.83,22.01 L3.2 | 42.45,22.39 41.56,23.28 v41.56,23.4 41.56,25.69 40.8,26.45 40.55,26.45 U1.P$B5 | 42.45,22.39 v42.83,22.77
  Bottom 0.127: 39.28,20.74 39.53,20.74 39.53,21.37 v41.56,23.4 | 39.28,20.74 v38.39,20.74 | v41.44,18.58 39.28,20.74 | v45.35,29.07 45.35,25.28 v42.83,22.77
DN
  Top 0.127: 24.99,30.16 23.46,30.16 22.79,29.49 J4.A7 | D3.1 32.04,33.82 31.78,33.82 30.77,32.8 30.77,32.67 29.24,31.15 27.34,31.15 26.86,30.67 25.5,30.67 24.99,30.16 | 24.99,30.16 24.74,29.91 24.05,29.91 23.79,29.64 J4.B7
DP  (via drill 0.3)
  Top 0.127: 23.29,28.73 J4.A6 23.29,27.71 22.87,27.29 22.59,27.29 22.29,27.59 J4.B6 22.29,29.49 23.28,30.48 24.64,30.48 26.07,31.91 v29.37,31.91 | v31.02,31.91 32.04,31.91 D3.3
  Bottom 0.127: v29.37,31.91 v31.02,31.91
EPD_3V3
  Top 0.127: 10.63,15.73 J1.16 10.7,15.78 | 10.7,16.16 J1.15 | 13.75,15.91 13.75,15.78 | C1-EP-DR.1 14.28,15.38 | 12.1,15.78 EPD_C5.2 | 28.88,7.91 DMG2305UX-7.3 | 15.35,15.02 15.35,14.97 | 15.35,10.93 L5.2
  Top 0.305: EPD_C5.2 12.02,15.73 10.63,15.73 | 10.7,15.78 10.7,16.16 | 13.75,15.78 C1-EP-DR.1 | 13.75,15.91 13.62,16.04 12.35,16.04 12.1,15.78 | 28.88,7.91 26.58,7.91 19.77,14.72 15.35,14.72 | 15.35,15.02 14.64,15.02 14.28,15.38 | 15.35,14.97 15.35,14.72 | 15.35,14.72 15.35,10.93
GDR  (via drill 0.3)
  Top 0.127: v10.07,25.18 10.07,25.82 R2_EP_DR.2 | v9.81,22.89 10.45,22.89 10.57,22.77 J1.2 | v13.75,8.04 15.81,8.04 Q3.1
  Bottom 0.127: v10.07,25.18 10.07,23.15 v9.81,22.89 14.64,18.07 14.64,14 13.75,13.12 v13.75,8.04
GND  (via drill 0.3, 0.35)
  Top 0.127: 28.48,14.26 28.23,14.26 IC9.B1 | 28.48,14.26 28.48,14.51 IC9.C2 28.61,14.64 28.61,15.02 IC9.C3 28.48,15.02 28.48,15.15 28.23,15.4 | 28.48,14.26 IC9.C1 | 25.94,15.02 25.69,15.28 C24.1 25.56,15.4 25.31,15.4 22.51,18.2 20.99,18.2 20.1,19.09 J2.3 | 25.94,15.02 26.2,14.77 26.2,14 25.72,13.53 C25.2 | 28.23,15.4 27.72,15.91 26.83,15.91 25.94,15.02 | 28.23,15.4 28.86,16.04 32.55,16.04 34.35,14.23 37.78,14.23 37.88,14.13 37.88,14 C38.1 37.88,13.88 37.88,13.5 39.09,12.29 TP_GND.TP 38.68,11.57 v37.65,11.57 | J2.3 20.1,19.21 20.1,20.36 J2.5 19.97,20.48 19.97,20.99 19.59,21.37 19.59,26.58 | IC2.B3 11.13,27.62 12.18,26.58 18.7,26.58 | 39.53,22.64 39.28,22.39 39.28,21.75 U1.P$F23 | U1.P$B7 40.55,26.07 39.78,26.07 39.66,26.2 U1.P$74 39.53,22.64 | IC2.B1 11.99,29.54 C32.1 11.99,30.58 12.93,30.58 | U3.6 14.96,32.34 | 16.57,32.81 U3.4 | 12.93,30.58 | U3.1 16.83,31.31 | C18.1 42.35,25.9 42.35,26.22 42.86,26.73 44.69,26.73 45.13,27.17 44.98,27.29 C12.2 44.99,27.34 45.37,27.72 45.37,28.48 45.25,28.61 44.48,28.61 | 42.2,29.75 41.69,29.75 C17.1 41.69,29.88 41.69,30.52 C3.2 | 44.48,29.63 44.48,29.75 C16.2 | 44.2,29.63 44.2,28.61 | 44.48,28.61 44.48,28.23 C5.2 | 44.48,29.63 44.2,29.63 | 44.2,29.63 C7.2 | 44.48,29.63 C16.2 | C16.2 44.61,29.88 44.61,30.42 C10.2 44.66,30.69 44.66,31.15 43.67,32.14 | C39.2 42.83,32.8 43.49,32.14 43.67,32.14 | 42.2,29.75 42.2,28.99 42.58,28.61 44.2,28.61 | 44.48,28.61 44.2,28.61 | 42.2,29.75 C4.2 | 38.01,18.7 37.75,18.7 C9.2 | 38.01,18.7 38.13,18.83 38.13,19.72 | 38.13,19.72 38.13,20.1 C11.2 | 38.13,19.72 38.9,19.72 39.28,20.1 39.66,20.1 C1.2 39.78,20.23 39.78,20.61 40.17,20.99 40.17,21.37 40.55,21.75
  Top 0.127: 38.01,18.7 38.26,18.45 38.26,16.93 X1.4 38.39,16.93 39.53,15.78 39.78,15.78 X1.2 | C14.2 45.12,20.43 45.12,19.47 C6.2 44.73,19.16 44.61,18.88 43.62,18.88 43.34,19.16 | 41.56,20.48 41.44,20.36 41.44,20.1 C2.2 | 41.56,20.48 42.58,20.48 42.96,20.1 C33.2 | C13.2 43.98,20.99 43.98,20.74 43.85,20.61 43.59,20.61 43.09,20.1 C33.2 | 43.34,19.16 43.34,19.72 43.09,19.97 C33.2 | 43.34,19.16 43.34,18.2 C15.2 | 31.02,27.47 30.89,27.59 C19.2 30.77,27.59 30.77,27.34 30.39,26.96 30.39,26.83 R3.1 30.26,26.83 v29.75,26.32 | 31.02,27.47 31.28,27.21 31.28,26.83 32.67,25.44 C20.2 | 31.02,27.47 32.55,28.99 C21.2 | IC1.D2 38.94,29.18 40.11,30.36 v40.11,30.52 40.06,30.52 40.06,31.48 40.48,31.9 R9.1 40.18,32.16 39.78,32.55 C37.1 39.73,32.64 39.73,32.85 39.53,33.05 39.28,33.05 38.9,32.67 38.26,32.67 C23.2 | C8.2 42.83,30.52 43.34,30.52 C22.2 43.34,30.64 v43.34,31.15 | IC3.9 35.21,16.54 34.83,16.54 IC3.8 34.83,16.42 v34.83,15.91 | v23.89,25.66 24.39,25.66 24.93,26.2 24.93,26.32 R1_USB.1 | v24.93,27.42 24.42,26.91 R2_USB.2 | 26.26,28.99 26.25,28.98 | 26.25,28.98 J4.A1_B12 | 27.35,29.54 J4.SH3 26.81,29.53 26.25,28.98 | J4.SH1 28.5,33.68 29.25,34.43 33.11,34.43 33.11,33.5 32.52,32.91 D3.2 | 41.56,20.48 41.56,20.74 40.55,21.75 | 40.55,21.75 U1.P$78 39.53,22.64 | v44.18,32.12 44.15,32.14 43.67,32.14 | U3.1 16.91,31.31 18.7,29.53 J4.SH4 19.3,28.96 J4.A12_B1 18.7,27.82 18.7,26.58 | C43.2 19.59,26.58 | 19.59,26.58 18.7,26.58 | SW_DN.1 35.72,4.1 35.85,4.23 35.85,4.86 C29.1 35.85,4.99 37.88,7.02 D1.1 36.9,8.09 v35.98,8.09 | C42.2 26.07,4.18 26.07,3.97 25.82,3.72 24.8,3.72 24.67,3.84 SW_ENT.1 24.55,3.97 24.55,4.48 23.66,5.37
  Top 0.127: v19.85,3.34 20.35,2.83 C31.1 | 23.66,5.37 24.04,5.75 SJ1.1 23.66,5.37 | 23.66,5.37 23.27,4.99 22.39,4.99 22.13,4.73 21.24,4.73 v20.86,4.35 14.77,4.35 14.26,3.84 13.5,3.84 13.37,3.97 SW_UP.1 13.24,4.1 12.99,4.35 12.99,4.99 R_TYPE_SEL.1 C30.1 12.23,5.12 EPD_C11.2 | 9.56,25.82 7.91,24.16 J1.MP1 8.04,24.04 8.04,21.88 10.19,19.72 | 9.56,25.82 8.04,27.34 8.04,28.17 7.05,29.16 C27.1 5.67,28.86 TP_VBAT_GND.TP | 9.56,25.82 R2_EP_DR.1 | C34.1 13.09,18.74 13.09,18.17 12.86,17.94 12.86,17.18 12.73,17.05 | 12.26,16.63 12.71,17.08 12.73,17.05 | 12.26,16.63 12.29,16.61 12.23,16.54 EPD_C2.2 | 12.26,16.63 11.16,17.74 11.16,19.52 10.96,19.72 10.7,19.72 J1.8 10.57,19.72 10.19,19.72 | 12.73,17.05 13.12,16.67 13.5,16.67 EPD_C1.2 13.5,16.54 15.15,18.2 17.43,18.2 17.69,18.45 18.96,18.45 19.59,19.09 19.97,19.09 J2.3 | 12.1,15.02 12.1,14.39 EPD_C6.2 | C1-EP-DR.2 12.46,15.38 12.1,15.02 | 12.1,15.02 EPD_C5.1 10.7,15.15 J1.17 10.57,15.15 10.19,15.15 | EPD_C6.2 13.12,13.37 13.37,13.37 EPD_C7.2 | EPD_C6.2 | 12.86,11.08 EPD_C12.2 | 12.86,11.08 EPD_C10.2 | EPD_C11.2 11.08,8.92 | 12.86,11.08 12.86,9.56 EPD_C11.2 | EPD_C11.2 | 11.08,8.92 10.45,8.29 9.69,8.29 9.05,8.92 EPD_C9.2 8.67,8.92 8.67,10.32 8.04,10.96 J1.MP2 8.04,11.08 8.04,12.99 10.19,15.15 | 11.08,8.92 EPD_C8.2 | 10.19,19.72 9.94,19.47 9.94,15.4 10.19,15.15 | U3.1 16.16,30.58 12.93,30.58 | U3.6 14.93,32.24 | U3.4 16.67,32.81 | U3.4 16.54,32.81 15.91,32.19 U3.9 | U3.6 15.66,32.31 U3.9 | U3.1 16.51,31.31 15.91,31.91 U3.9
  Route2 0.127: v37.65,11.57 37.65,9.76 v35.98,8.09
  Bottom 0.127: v23.89,25.66 23.89,27.24 22,29.12 J4.SH4 | v24.93,27.42 27.15,27.42 27.16,27.52 | 27.16,27.52 27.16,27.47 28.1,27.47 28.48,27.09 28.48,26.32 v29.75,26.32 30.23,25.84 30.23,21.4 34.83,16.8 v34.83,15.91 | 27.16,27.52 J4.SH3 | U1.P$75 39.78,26.33 39.53,29.29 40.11,29.88 v40.11,30.52 40.11,31.99 40.93,32.8 41.18,32.8 42.83,31.15 v43.34,31.15 44.18,31.99 v44.18,32.12 | v20.86,4.35 v19.85,3.34
  pour Route15: -1.16,-0.78 48.34,-0.78 48.34,36.92 -1.16,36.92
IMU_INT1
  Top 0.127: U1.P$N1 37.55,27.8 37.55,28.05 36.03,29.57 31.86,29.57 30.39,28.1 30.13,28.1 27.82,25.79 27.82,20.66 27.59,20.43 27.59,19.59 29.5,17.69 33.92,17.69 IC3.5
IMU_INT2  (via drill 0.15, 0.35)
  Top 0.127: 37.28,27.94 36,29.22 v35.72,29.22 | IC3.6 33.76,17.03 v33.69,17.1
  Top 0.15: U1.P$P2 37.28,27.94
  Route2 0.127: v35.72,29.22 35.54,29.04 34.3,29.04 33.94,28.69 33.94,26.96 31.81,26.96 30.59,25.74 27.82,25.74 27.77,25.79 27.77,27.11 26.2,27.11 23.73,24.65 23.73,21.04 25.18,19.59 27.39,19.59 29.88,17.1 v33.69,17.1
LX1
  Top 0.127: 28.1,15.02 28.1,14.64 IC9.B2 | 28.1,15.02 28.1,15.15 27.59,15.66 27.09,15.66 26.7,15.28 26.7,12.35 27.59,11.46 L7.1 | 28.1,15.02 IC9.B3
LX2  (via drill 0.3)
  Top 0.127: 28.99,15.02 28.99,14.64 IC9.D2 | v28.99,15.53 28.99,15.02 | v28.74,12.76 28.74,12.35 29.62,11.46 L7.2 | 28.99,15.02 IC9.D3
  Bottom 0.127: v28.99,15.53 28.74,15.28 v28.74,12.76
N$1  (via drill 0.3)
  Top 0.127: v39.02,21.37 39.02,21.5 38.77,21.75 U1.P$H23 | v40.34,29.45 40.34,29.7 40.96,30.32 C3.1 41.18,30.64 41.18,30.9 41.69,31.4 41.69,31.79 L1.1
  Bottom 0.127: v39.02,21.37 39.66,22.01 39.78,22.01 40.34,22.56 v40.34,29.45
N$2
  Top 0.127: IC9.D1 28.93,13.33 29.02,13.24 R4.2
N$3
  Top 0.127: 39.78,27.34 39.78,27.59 39.66,27.72 39.66,28.13 41.25,29.72 C17.2 | 39.78,27.34 40.67,27.34 42.07,25.94 42.07,25.31 42.45,24.93 43.21,24.93 44.74,23.4 X2.1 | 39.78,27.34 U1.P$D2
N$4
  Top 0.127: IC9.E1 29.37,14.13 32.04,14.13 32.42,13.75 R2.2
N$5  (via drill 0.3)
  Top 0.127: v39.15,28.23 39.4,27.98 39.4,27.72 39.28,27.59 39.28,27.34 U1.P$F2 | v43.27,26.22 43.27,25.84 C18.2 43.09,25.69 44.74,25.69 X2.2
  Route2 0.127: v39.15,28.23 40.67,28.23 42.68,26.22 v43.27,26.22
N$6
  Top 0.127: U1.P$B3 40.55,26.96 40.8,26.7 40.93,26.7 41.82,25.82 41.82,24.29 42.71,23.4 L2.1
N$7
  Top 0.127: R9.2 40.55,31.33 40.55,30.31 39.1,28.86 38.64,28.86 38.26,29.24 38.26,29.37 IC1.D1
N$8
  Top 0.127: L3.1 43.85,22.01 43.85,22.51 43.34,23.02 43.34,23.78 42.83,24.29 L2.2
N$9
  Top 0.127: C2-EP-DR.1 42.43,7.95 D1.2 41.44,7.02 41.44,3.46 D5.1
N$10  (via drill 0.3)
  Top 0.127: U1.P$B24 40.55,21.24 40.55,20.48 40.29,20.23 C1.1 40.04,19.98 v40.04,19.19 | v37.55,17.61 37.55,16.49 38.26,15.78 X1.1
  Bottom 0.127: v40.04,19.19 39.12,19.19 v37.55,17.61
N$11  (via drill 0.3)
  Top 0.127: v36.36,20.74 35.85,20.23 35.85,18.07 IC3.1 | v31.66,25.44 31.66,26.07 30.89,26.83 R3.2
  Route2 0.127: v31.66,25.44 31.66,25.33 36.25,20.74 v36.36,20.74
N$12  (via drill 0.3, 0.35)
  Top 0.127: v41.05,10.5 42.43,10.5 C2-EP-DR.2 | L5.1 19.62,10.58 v22.39,10.58 22,10.19 19.68,6.69 Q3.3
  Top 0.152: D2.2 3.67,3.38 v3.67,6.41
  Route2 0.152: v3.67,6.41 v6.69,6.41
  Bottom 0.127: v22.39,10.58 32.16,10.58 32.16,10.5 | 32.16,10.5 v41.05,10.5 | 9.18,3.97 13.75,3.97 14.89,2.83 20.1,2.83 22.39,5.12 31.78,5.12 32.16,5.5 32.16,10.5
  Bottom 0.152: v6.69,6.41 9.13,3.97 9.18,3.97
N$13
  Top 0.127: U1.P$N24 37.63,21.24 37.63,19.21 C9.1
N$14  (via drill 0.3)
  Top 0.127: v41.56,21.37 41.44,21.37 41.05,21.75 U1.P$A23 | C2.1 41.82,19.97 41.82,19.72 v41.51,19.41 39.91,17.82 39.91,16.93 X1.3
  Bottom 0.127: v41.56,21.37 41.51,21.32 v41.51,19.41
N$15
  Top 0.127: 14.64,4.99 14.26,5.37 13.88,5.37 13.62,5.12 13.62,4.99 R_TYPE_SEL.2 | 14.64,4.99 21.5,4.99 SJ1.2 | 14.64,4.99 R1_EP_DR.1
N$16
  Top 0.127: IC2.A2 12.15,28.7 12.36,28.76 C32.2
N$17  (via drill 0.3)
  Top 0.127: v35.09,27.72 34.96,27.59 34.96,26.58 U1.P$AC5 | v33.31,25.94 33.05,25.94 32.67,26.32 C20.1
  Route2 0.127: v33.31,25.94 v35.09,27.72
N$18
  Top 0.127: R2_USB.1 23.2,26.3 21.29,28.21 J4.B5
N$19
  Top 0.127: R1_USB.2 25.05,26.96 25.46,26.96 25.46,27.87 25.34,27.99 24.29,27.99 J4.A5
N$20
  Top 0.127: J1.4 10.7,21.75 10.96,21.75 11.46,21.24 11.46,18.2 11.96,17.7 EPD_C2.1
N$21
  Top 0.127: EPD_C1.1 13.5,21.24 11.08,23.66 9.94,23.66 9.3,23.02 9.3,22.26 10.19,21.37 10.57,21.37 J1.5
N$22
  Top 0.127: J1.18 10.7,14.64 11.08,14.64 11.59,14.13 11.59,13.88 EPD_C6.1
N$23  (via drill 0.3)
  Top 0.127: v11.34,13.5 11.34,13.88 10.96,14.26 10.7,14.26 J1.19 | v14.13,14.13 13.37,14.13 EPD_C7.1
  Bottom 0.127: v11.34,13.5 13.5,13.5 v14.13,14.13
N$24
  Top 0.127: U1.P$A18 41.05,23.28 41.56,22.77 41.69,22.77 42.45,22.01 42.45,21.5 42.83,21.12 43.47,21.12 C13.1
N$25  (via drill 0.3)
  Top 0.127: v10.07,9.69 EPD_C8.1 | v9.81,13.5 10.07,13.5 10.32,13.75 10.57,13.75 J1.20
  Bottom 0.127: v10.07,9.69 10.07,13.24 v9.81,13.5
N$26  (via drill 0.3)
  Top 0.127: v7.91,9.69 7.91,8.92 EPD_C9.1 | v8.92,10.7 8.92,11.97 10.19,13.24 10.57,13.24 J1.21
  Bottom 0.127: v8.92,10.7 v7.91,9.69
N$27
  Top 0.127: J1.22 10.7,12.73 11.59,12.73 EPD_C10.1
N$28
  Top 0.127: EPD_C11.1 11.59,9.94 9.94,11.59 9.94,11.97 10.19,12.23 10.57,12.23 J1.23
N$29
  Top 0.127: J1.24 10.7,11.72 11.59,11.72 11.72,11.59 12.99,11.59 13.37,11.97 EPD_C12.1
OUT+  (via drill 0.35)
  Top 0.305: v14.24,29.1 12.81,27.67 12.8,27.68 IC2.A3 | v12.38,32.7 11.07,32.7 TP_OP.TP
  Route2 0.305: v14.24,29.1 14.59,29.45 14.59,32.24 14.13,32.7 v12.38,32.7
OUT-  (via drill 0.35)
  Top 0.305: v13.12,25.33 12.72,25.33 10.63,27.42 IC2.C3 | TP_ON.TP 8.42,28.2 v9.03,27.59
  Route2 0.305: v13.12,25.33 11.95,26.5 9.58,26.5 9.03,27.06 v9.03,27.59
P0.13/1.5D
  Top 0.127: SW_UP.2 10.32,4.1 10.19,4.23 10.19,4.86 R5.1 10.19,4.99 10.19,5.62 10.96,6.38 11.21,6.38 11.59,6 11.59,5.12 C30.2
P0.14/1.5D
  Top 0.127: 19.34,3.21 20.23,2.32 20.38,2.32 C31.2 | 19.34,3.21 19.34,3.46 19.72,3.84 21.62,3.84 SW_ENT.2 | 19.34,3.21 18.58,2.45 14.64,2.45 R8.1
P1.01/1.6C
  Top 0.127: R_PWR_EPD.1 28.61,5.62 28.03,5.62 DMG2305UX-7.1
P1.02/1.6C  (via drill 0.3)
  Top 0.127: SW_DN.2 32.8,4.1 32.93,4.23 32.93,4.86 R7.1 32.93,4.99 32.67,5.24 v32.67,5.5 | v35.21,5.5 35.21,4.99 C29.2
  Bottom 0.127: v32.67,5.5 v35.21,5.5
PMIC_INT  (via drill 0.15, 0.35)
  Top 0.127: IC1.A1 37.18,30.61 v37.17,30.62
  Route2 0.127: v37.17,30.62 36.78,30.23 U1.P$T2
  other vias: 36.78,27.27
RESE  (via drill 0.3)
  Top 0.127: v14.13,4.35 14.13,4.86 R1_EP_DR.2 | v14.64,5.62 15.02,6 16.47,6 Q3.2 | v11.97,20.1 11.97,21.24 10.96,22.26 10.7,22.26 J1.3
  Bottom 0.127: 14.13,5.12 v14.13,4.35 | v14.64,5.62 14.13,5.12 | v11.97,20.1 11.97,14.77 10.57,13.37 10.57,5.75 11.21,5.12 14.13,5.12
RESET  (via drill 0.15, 0.3, 0.35)
  Top 0.127: v19.34,20.99 18.83,20.48 J2.6 | v23.02,23.02 23.02,23.15 25.26,25.39 25.88,25.39 TP_RESET.TP 25.98,25.63 v26.86,26.5 | v33.26,22.77 33.71,23.23 33.71,23.99 | U1.P$AC13 35.03,24.37
  Top 0.15: 35.03,24.37 34.65,23.99 33.71,23.99
  Route2 0.127: v29.65,25.13 32.01,22.77 v33.26,22.77
  Bottom 0.127: v19.34,20.99 19.97,20.99 20.1,20.86 20.86,20.86 v23.02,23.02 | v26.86,26.5 28.23,25.13 v29.65,25.13
  other vias: 35.03,24.52
RF  (via drill 0.3)
  Top 0.127: C4.1 42.83,29.88 43.09,30.13 43.59,30.13 43.98,30.52 C22.1 43.85,30.64 43.85,31.28 43.34,31.79 42.83,31.79 L1.2 42.71,31.91 42.33,32.29 v42.33,33.44 | v42.83,19.34 42.83,17.59 40.98,17.59 40.58,17.18 40.53,15.59 ANT1.1
  Route2 0.127: v42.33,33.44 42.33,33.05 43.98,31.4 43.98,20.48 v42.83,19.34
SCL/1.4C
  Top 0.127: IC2.C1 11.41,29.46 11.41,30.72 12.46,31.76 14.84,31.76 U3.7
SCL/2.4C  (via drill 0.15, 0.3)
  Top 0.127: R4.1 33.44,13.24 v33.82,12.86 35.34,11.34 TP_SCL.TP | v35.92,30.21 36,30.13 38.12,30.13 IC1.B1 | v33.31,28.36 33.31,27.34 R17.2 | v36.3,16.29 36.3,17.23 36.1,17.43 35.85,17.43 IC3.12
  Route2 0.127: U1.P$M2 37.78,28.36 37.27,28.86 v37.27,28.94
  Bottom 0.127: v33.82,12.86 33.82,13.37 36.3,15.86 v36.3,16.29 36.3,16.6 33.79,19.11 33.79,27.87 v33.31,28.36 33.31,29.35 34.45,30.49 35.92,30.49 v35.92,30.21 36,30.21 v37.27,28.94
  other vias: 37.78,27.27
SDA/1.4C  (via drill 0.15, 0.35)
  Top 0.152: U3.8 14.79,31.17 v13.34,31.17
  Route2 0.152: v13.34,31.17 13.37,31.15 13.37,29.19 12.15,29.19 IC2.B2
  other vias: 11.13,28.18
SDA/2.4C  (via drill 0.3)
  Top 0.127: U1.P$L1 38.11,27.77 38.21,27.88 38.21,28.61 38.01,28.81 38.01,29.12 37.88,29.24 37.88,29.63 | 37.88,29.63 38.13,29.88 IC1.C1 | v33.56,13.75 R2.1 | v35.21,17.05 35.21,17.94 IC3.2 | v35.52,31.51 35.86,31.51 R18.2 | v37.63,29.63 37.88,29.63 | v26.93,21.98 25.92,20.96 TP_SDA.TP
  Bottom 0.127: v33.56,13.75 33.56,14 34.83,15.28 | 34.83,15.28 35.34,15.78 35.34,16.93 v35.21,17.05 35.14,17.05 32.44,19.75 32.44,28.94 35.01,31.51 v35.52,31.51 37.45,29.57 37.58,29.57 v37.63,29.63 | v26.93,21.98 26.93,23.43 26.45,23.91 26.45,24.16 26.83,24.55 27.09,24.55 28.05,23.58 28.05,22.06 34.83,15.28
SWDCLK  (via drill 0.3)
  Top 0.127: v33.36,21.02 34.22,21.02 34.83,21.62 35.21,21.62 35.47,21.37 35.47,21.24 U1.P$AA24 | v26.96,24.04 25.75,22.83 TP_SWDCLK.TP | v19.34,19.72 18.83,19.21 J2.4
  Route2 0.127: v33.36,21.02 29.98,21.02 v26.96,24.04
  Bottom 0.127: v19.34,19.72 19.85,19.72 21.37,18.2 23.53,18.2 27.09,14.64 27.34,14.64 27.72,15.02 27.72,23.28 v26.96,24.04
SWDIO  (via drill 0.3)
  Top 0.127: v35.47,20.74 35.09,21.12 35.09,21.24 U1.P$AC24 | 29.75,19.97 28.86,19.97 TP_SWIO.TP 29.75,19.97 | v32.93,19.92 30.64,19.92 29.75,19.97 | v32.93,19.92 32.57,19.57 31.15,19.57 v29.73,18.14 | v19.46,15.4 18.58,16.29 18.58,16.8 18.7,16.93 18.7,17.82 J2.2 | v32.93,19.92 32.98,19.92
  Route2 0.127: v35.47,20.74 34.58,20.74 33.77,19.92 v32.93,19.92
  Bottom 0.127: v19.46,15.4 20.99,15.4 22,14.39 27.47,14.39 28.48,15.4 28.48,16.9 v29.73,18.14
SWO
  Top 0.127: U1.P$AD22 34.45,22.26 31.91,22.26 31.02,21.37 TP_SWO.TP
VBAT/1.2A
  Top 0.127: 16.95,32.31 U3.3 | C27.2 7.41,30.57 | TP_VBAT.TP 5.27,32.7
  Top 0.305: 7.41,30.57 5.27,32.7 | U3.3 17.56,32.32 17.56,33.59 5.82,33.59 TP_VBAT.TP | U3.3 U3.2
VBAT/2.5C
  Top 0.127: 38.87,29.73 38.79,29.81 IC1.C2 | C37.2 39.35,32.25
  Top 0.305: 38.87,29.73 38.97,29.73 39.61,30.36 39.61,31.99 39.35,32.25
VBUS/1.5D
  Top 0.127: 25.71,4.47 C42.1 | 25.44,28.42 J4.A4_B9 | 34.58,32.88 D3.5 | 29.43,17.24 29.27,17.08 | 23.27,25.23 | 26.3,27.58 26.3,27.57
  Top 0.305: J4.A9_B4 20.64,28.07 21.79,27.16 C43.1 23.27,25.23 | 29.43,17.24 27.21,19.47 27.21,21.5 27.47,21.75 27.47,26.81 27.24,27.04 26.83,27.04 26.3,27.57 25.44,28.42 | 25.71,4.47 27.74,7.02 33.05,7.02 35.39,9.36 39.1,9.36 40.5,10.75 40.5,12.43 38.34,14.59 34.5,14.59 32.01,17.08 29.27,17.08 25.16,17.08 24.04,18.2 24.04,19.97 22.46,21.55 22.46,23.25 23.27,24.06 23.27,25.23 | 34.58,32.88 33.38,33.25 33.38,31.66 31.07,30.46 28.19,27.58 26.3,27.58
VBUS/2.6D  (via drill 0.3)
  Top 0.127: v34.58,28.48 34.58,27.34 U1.P$AD2 | 32.67,30.01 C21.1 | v36.66,13.7 37.52,13.7 C38.2
  Top 0.305: 32.67,30.01 v34.76,30.01 35.9,31.15 38.61,31.15 38.61,30.63 IC1.A2
  Bottom 0.127: v34.76,30.01 34.76,28.66 v34.58,28.48 34.15,28.05
  Bottom 0.305: v36.66,13.7 36.66,15.83 37.12,16.29 34.15,19.26 34.15,28.05
VREG  (via drill 0.3)
  Top 0.127: 38.82,30.21 IC1.B2 | 41.44,32.93 41.82,32.93 C39.1 | IC9.A1 27.72,14.26 27.72,14.51 IC9.A2 27.72,14.64 27.72,15.02 IC9.A3 | C24.2 25.75,16.52 | 25.87,18.37 25.97,18.48 TP_VREG.TP
  Top 0.15: C23.1 37.87,32.62 37.85,32.6
  Top 0.305: 37.85,32.6 37.85,32.4 38.46,31.79 v38.54,31.79 38.64,31.79 39.05,31.38 39.05,30.44 38.82,30.21 | v41.05,33.31 41.44,32.93 | 27.72,15.02 27.34,15.02 v27.21,15.15 | v26.93,16.52 25.75,16.52 | 25.87,18.37 v24.62,18.37
  Bottom 0.127: 40.06,33.31 v41.05,33.31 | 27.21,16.24 v26.93,16.52 | v24.62,18.37 24.42,18.58
  Bottom 0.305: 40.06,33.31 v38.54,31.79 36.1,31.79 35.85,32.04 31.99,32.04 30.84,30.9 25.38,30.9 24.42,29.93 24.42,18.58 | 27.21,16.24 v27.21,15.15 | v26.93,16.52 26.93,16.06 v24.62,18.37
(copper drawn outside any net)
  shapes: Route15 area x1